# EAGLE board smile (EAGLE 9.4.2)
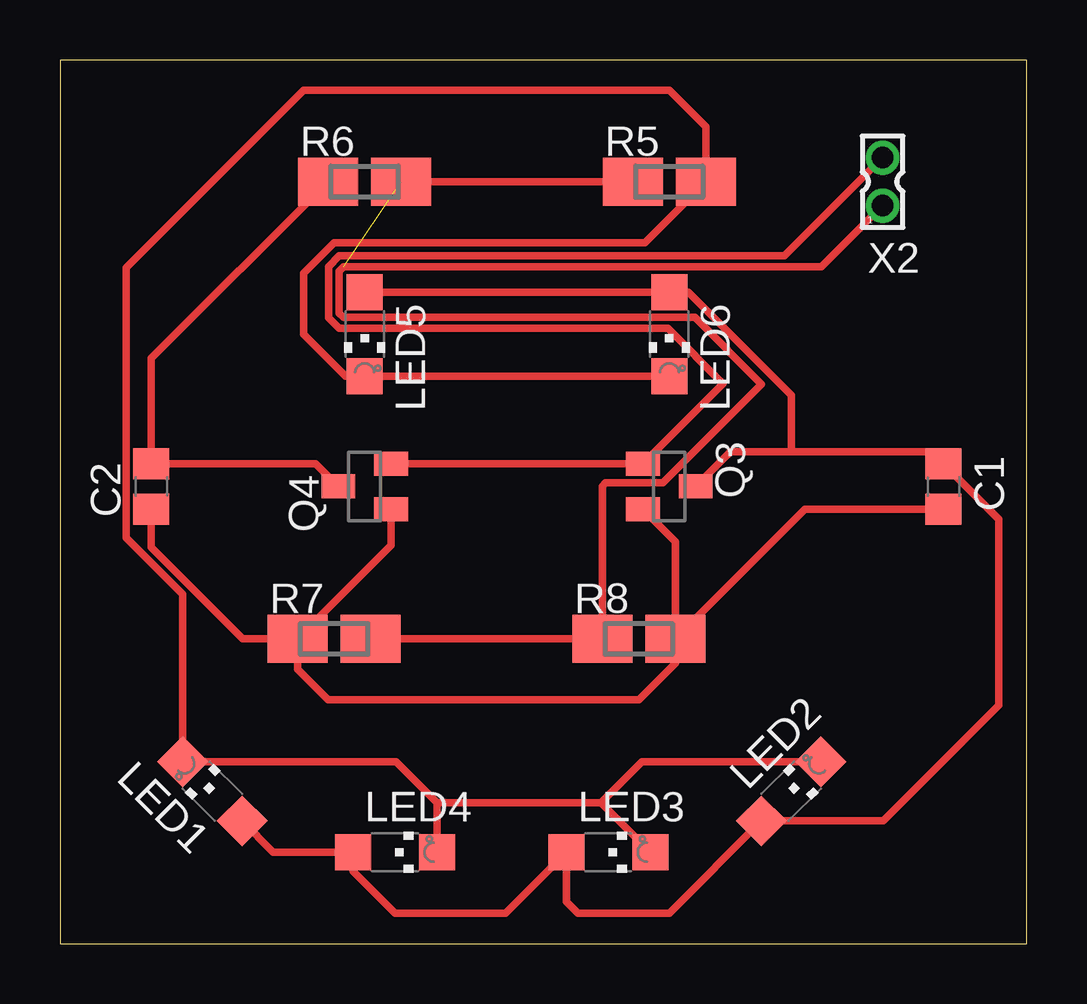
[diagram p0: board, top side]
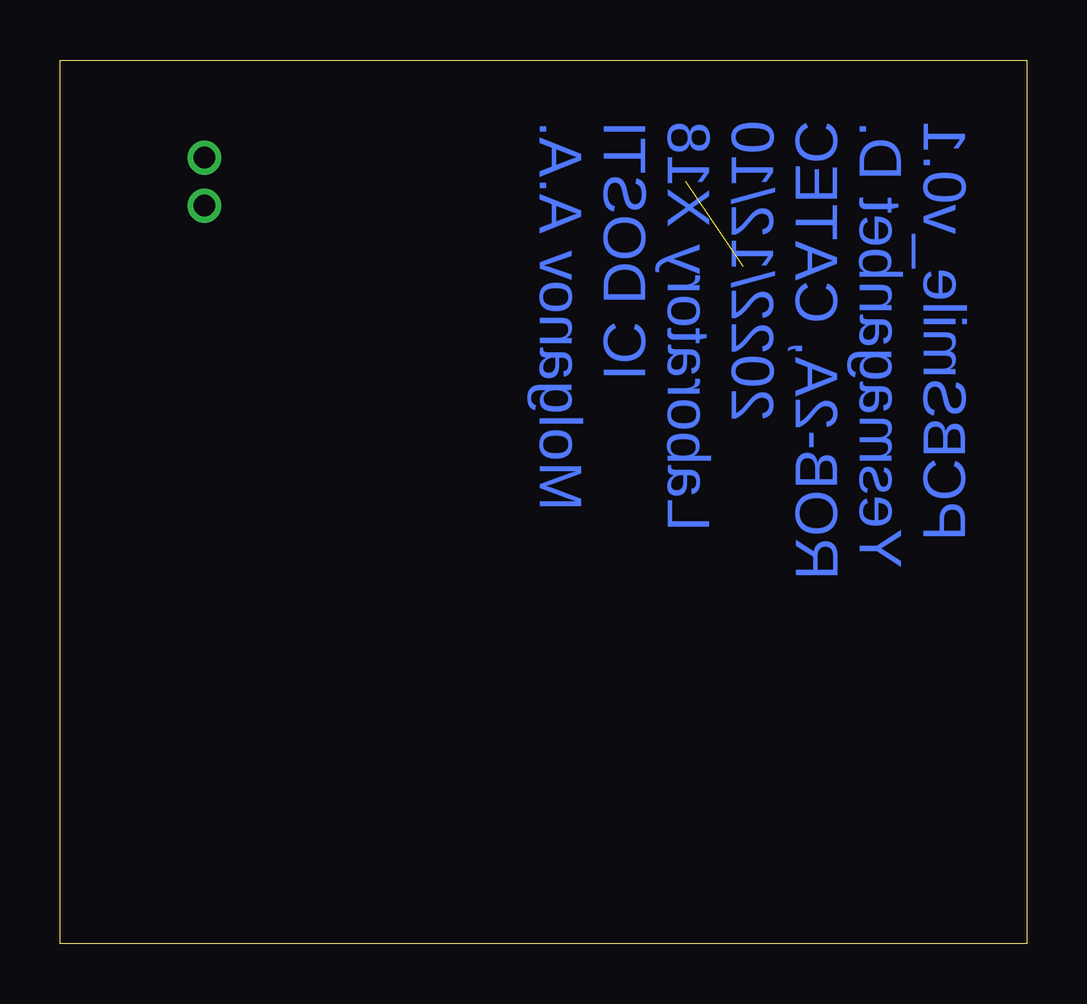
[diagram p1: board, bottom side, seen from below]

Size 40.31 x 36.82 mm. Coordinates in mm from the lower left corner, seen from the top.
Outline: 0,0 40.31,0 40.31,36.82 0,36.82 0,0
Copper layers (1*16): Top 0.035mm / dielectric 1.5mm / Bottom 0.035mm
Design rules "default": minimum track width 6mil, minimum drill 0.35mm, track to track 6mil, track to pad 6mil, pad to pad 6mil, via to via 6mil, smd to smd 6mil, copper to edge 40mil, drill to drill 6mil, minimum pad ring 10mil, minimum via ring 8mil, stop-mask expansion 4mil, vias tented up to drill 0mil, thermal gap 10mil

## Footprints (pad centres in the part's own frame; a part is rotated, then mirrored left to right if it is on the bottom)
C0805 = smd 1.3 x 1.5: 1 -0.95,0; 2 0.95,0
CHIPLED_1206 = smd 1.5 x 1.5: A 0,-1.75; C 0,1.75
SOT23 = smd 1 x 1.4: 1 -0.95,-1.1; 2 0.95,-1.1; 3 0,1.1
SMK = smd 2.5 x 2: 1 1.524,0; 2 -1.524,0
332-02 = drill 0.9 pad 1.27: 1 0,-1; 2 0,1

## Placement (x,y rotation side)
C1  100p  [C0805]  36.83,19.05 270 top
C2  100p  [C0805]  3.81,19.05 90 top
LED1  [CHIPLED_1206]  6.35,6.35 45 top
LED2  [CHIPLED_1206]  30.48,6.35 315 top
LED3  [CHIPLED_1206]  22.86,3.81 270 top
LED4  [CHIPLED_1206]  13.97,3.81 270 top
LED5  [CHIPLED_1206]  12.7,25.4 180 top
LED6  [CHIPLED_1206]  25.4,25.4 180 top
Q3  PNP  [SOT23]  25.4,19.05 270 top
Q4  PNP  [SOT23]  12.7,19.05 90 top
R5  [SMK]  25.4,31.75 0 top
R6  [SMK]  12.7,31.75 0 top
R7  [SMK]  11.43,12.7 0 top
R8  [SMK]  24.13,12.7 0 top
X2  332-02  [332-02]  34.29,31.75 0 top

## Library data of the parts
C1 C2 = rcl; SPICEPREFIX: C
LED1-LED6 = led
Q3 Q4 = semicon-smd-ipc
R5-R8 = resistor-shunt; OC_FARNELL: unknown; OC_NEWARK: unknown
X2 = con-garry

## Nets
GND: C1.2 C2.1 Q3.2 Q4.1 R7.2 R8.1
N$1: C1.1 LED1.A LED2.A LED3.A LED4.A LED5.A LED6.A Q3.3
N$2: Q3.1 Q4.2 X2.2
N$5: R5.2 R6.1 R7.1 R8.2 X2.1
N$6: LED1.C LED2.C LED3.C LED4.C LED5.C LED6.C R5.1
N$7: C2.2 Q4.3 R6.2

## Tracks (layer width: path | path; a pad name or v marks a point on that pad's centre or on a via)
GND
  Top 0.305: C2.1 3.81,16.51 7.62,12.7 R7.2 | R7.2 13.8,16.59 Q4.1 | R8.1 31.05,18.1 C1.2 | Q3.2 25.65,16.75 R8.1 | R7.2 9.91,11.43 11.18,10.16 24.13,10.16 25.65,11.68 R8.1
N$1
  Top 0.305: LED1.A 8.89,3.81 LED4.A 12.22,3.02 13.97,1.27 18.57,1.27 LED3.A 21.11,1.75 21.59,1.27 25.4,1.27 LED2.A 34.32,5.11 39.14,9.93 39.14,17.69 C1.1 36.34,20.49 30.48,20.49 | LED5.A LED6.A 26.19,27.15 30.48,22.86 30.48,20.49 | Q3.3 27.94,20.49 30.48,20.49
N$2
  Top 0.305: Q4.2 Q3.1 27.64,23.34 25.34,25.64 11.63,25.64 11.19,26.08 11.19,28.22 11.63,28.66 30.2,28.66 X2.2
N$5  (1 unrouted)
  Top 0.305: R6.1 R5.2 | R7.1 R8.2 22.61,19.07 22.73,19.2 25.13,19.2 29.24,23.31 26.46,26.09 11.82,26.09 11.64,26.27 11.64,28.03 11.82,28.2 31.74,28.2 X2.1
N$6
  Top 0.305: 15.72,5.87 LED4.C | 15.72,5.87 14,7.59 LED1.C 5.11,14.56 2.75,16.92 2.75,28.16 10.16,35.56 25.4,35.56 26.92,34.04 R5.1 24.38,29.21 11.43,29.21 10.16,27.94 10.16,25.4 11.91,23.65 LED5.C LED6.C | LED3.C 22.55,5.87 | 22.55,5.87 15.72,5.87 | LED2.C 24.27,7.59 22.55,5.87
N$7
  Top 0.305: R6.2 3.81,24.38 C2.2 10.65,20 Q4.3

## Text on the board
Bottom: PCBSmile_v0.1 / Yesmaganbet D. / ROB-2A, CATEC / 2022/12/10 / Laboratory X18 / IC DOSTI / Molganov A.A.